# Altium PCB PCB1.PcbDoc (part 1 of 2)
Units mm, origin at the board's own origin, x right, y up, seen from the top; angles counter-clockwise.
Board outline 70 x 50 mm, 4 copper layers (Top Layer, Layer 1, Layer 2, Bottom Layer), stack 1.571 mm thick; 129 components, 87 nets, 486 pads, 124 vias.
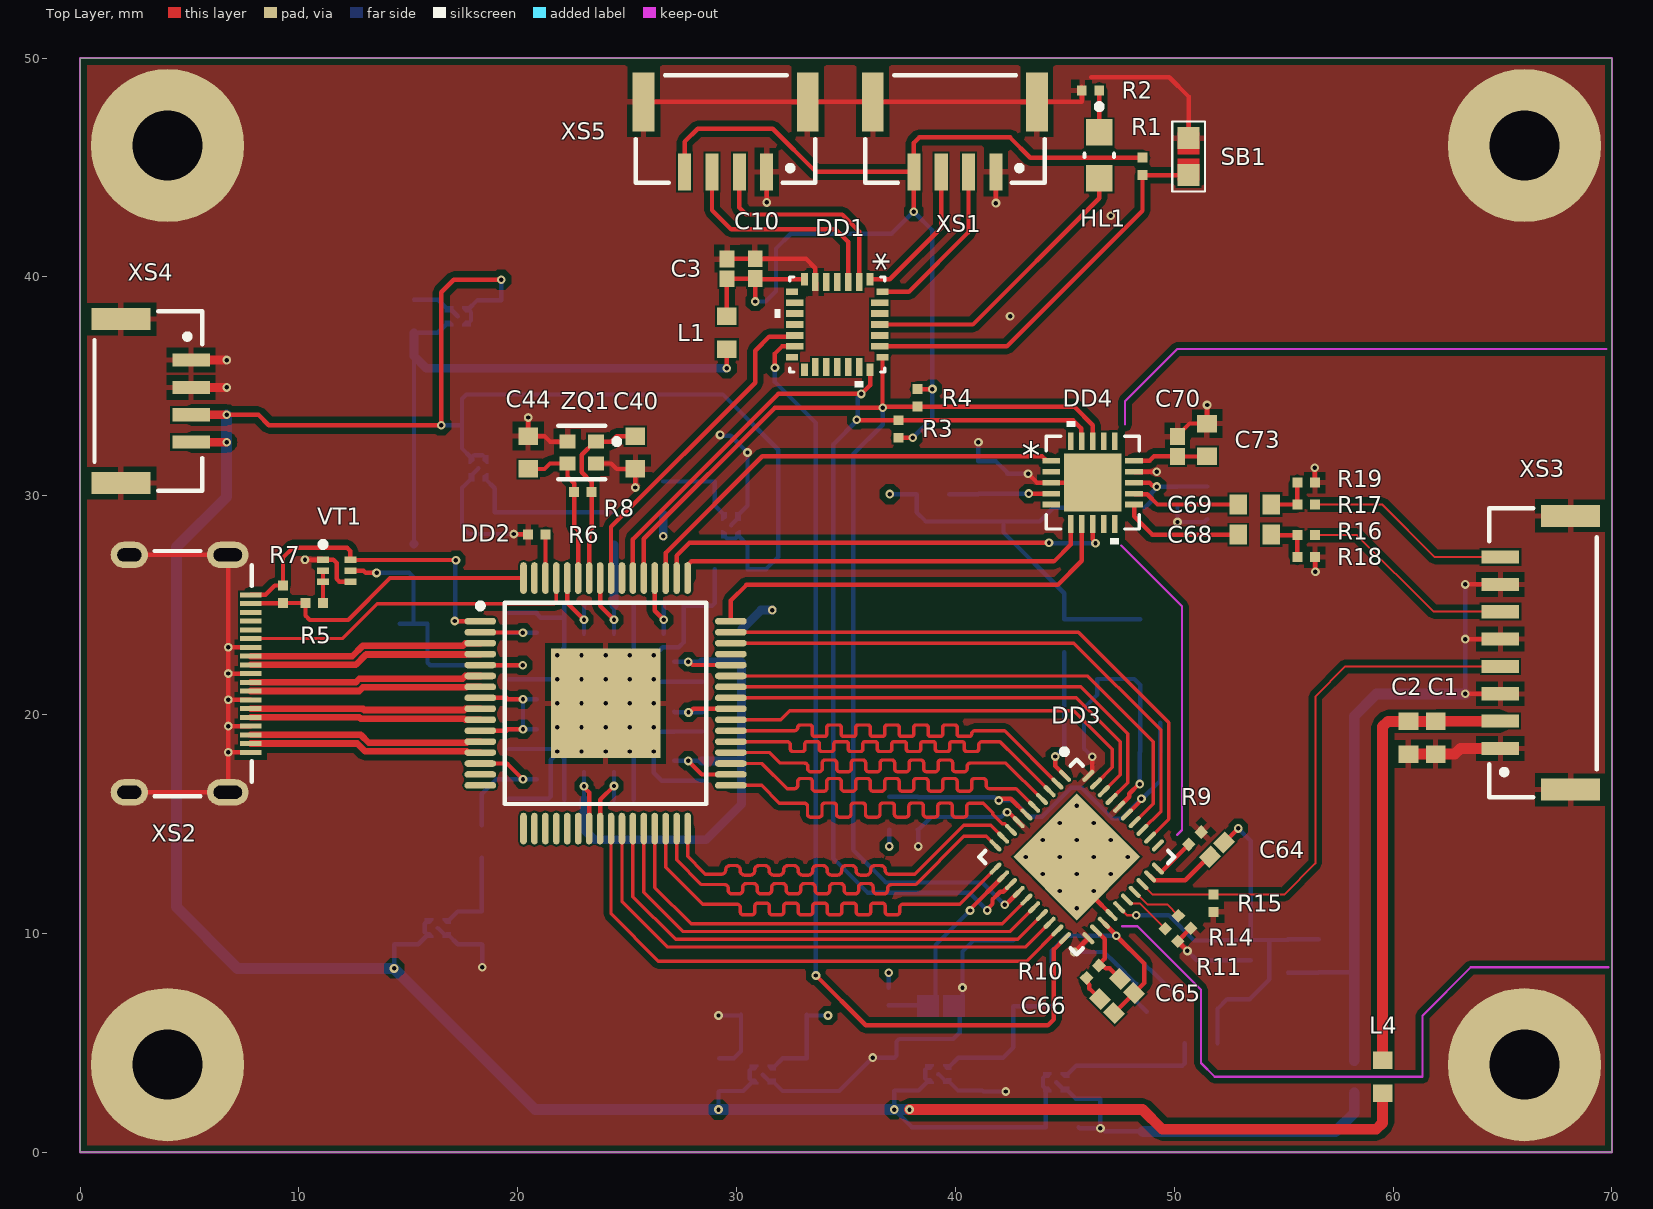
[diagram p0: Top Layer view]
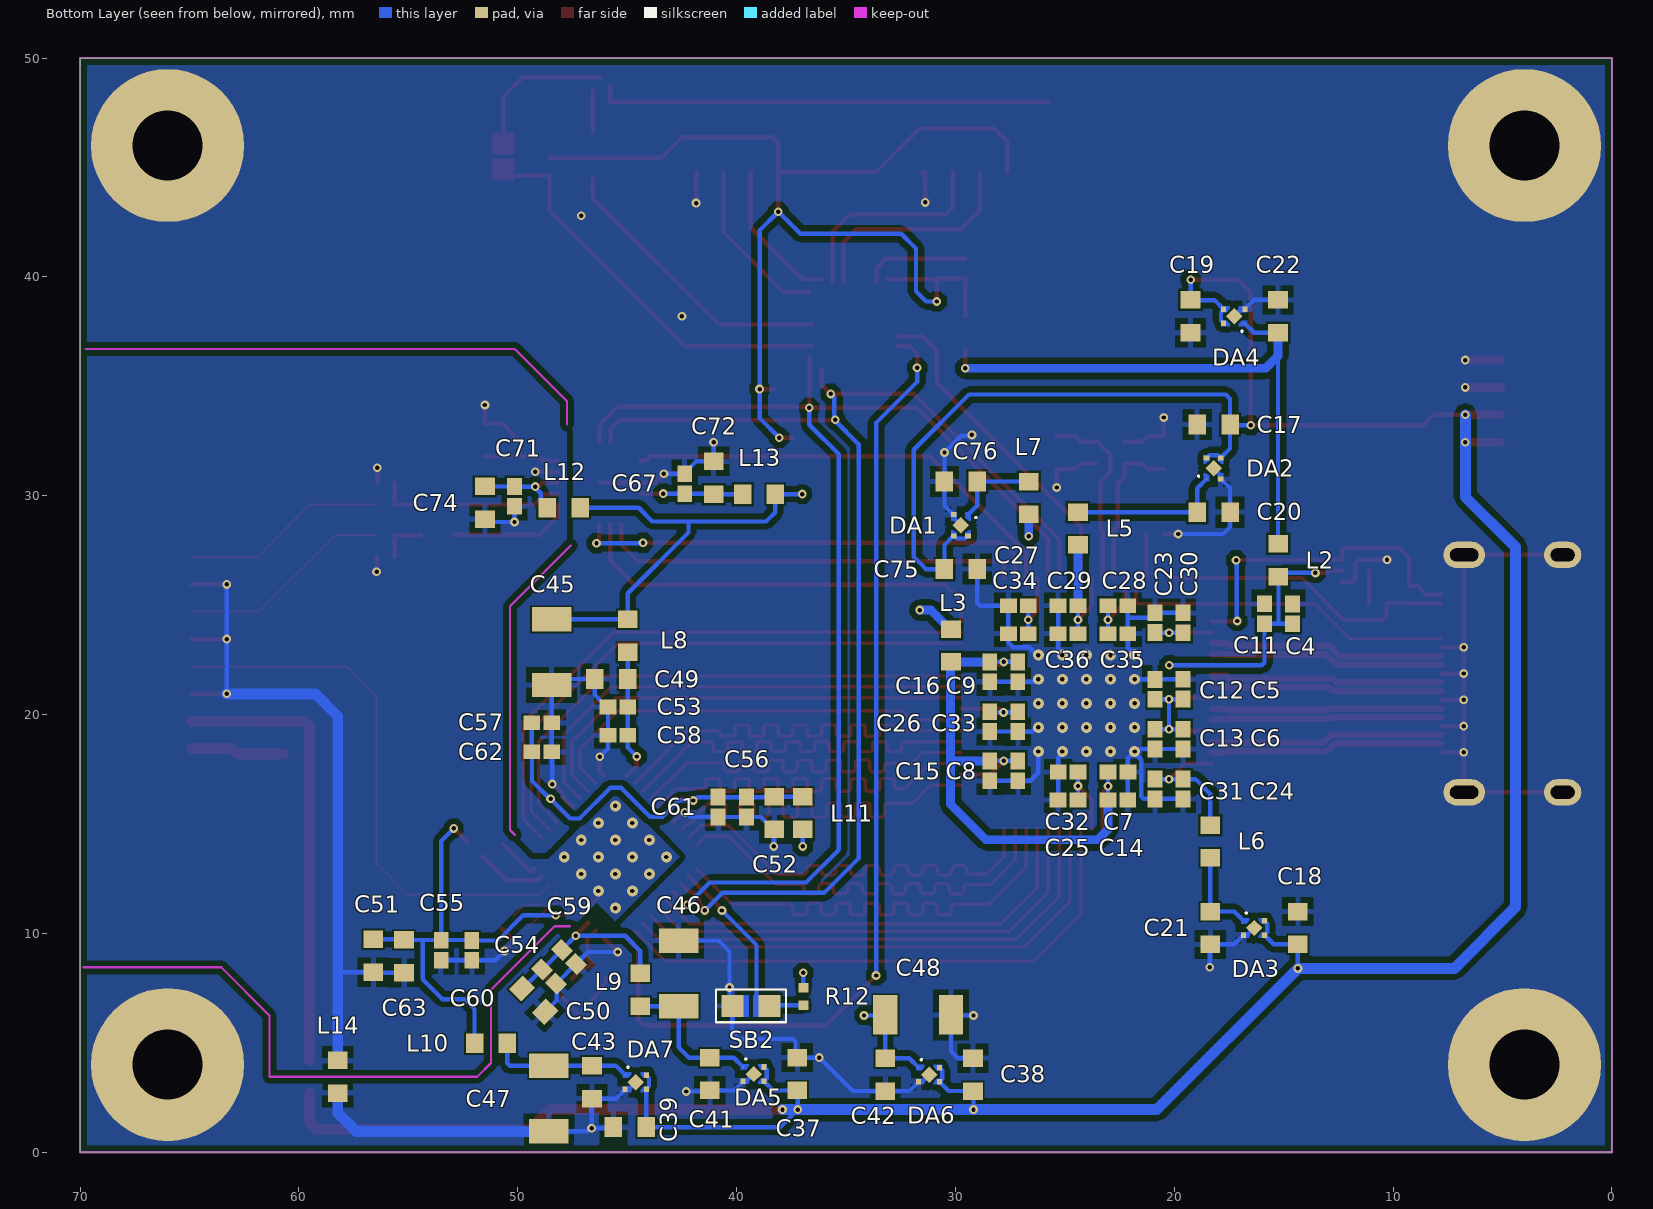
[diagram p1: Bottom Layer view, seen from below]
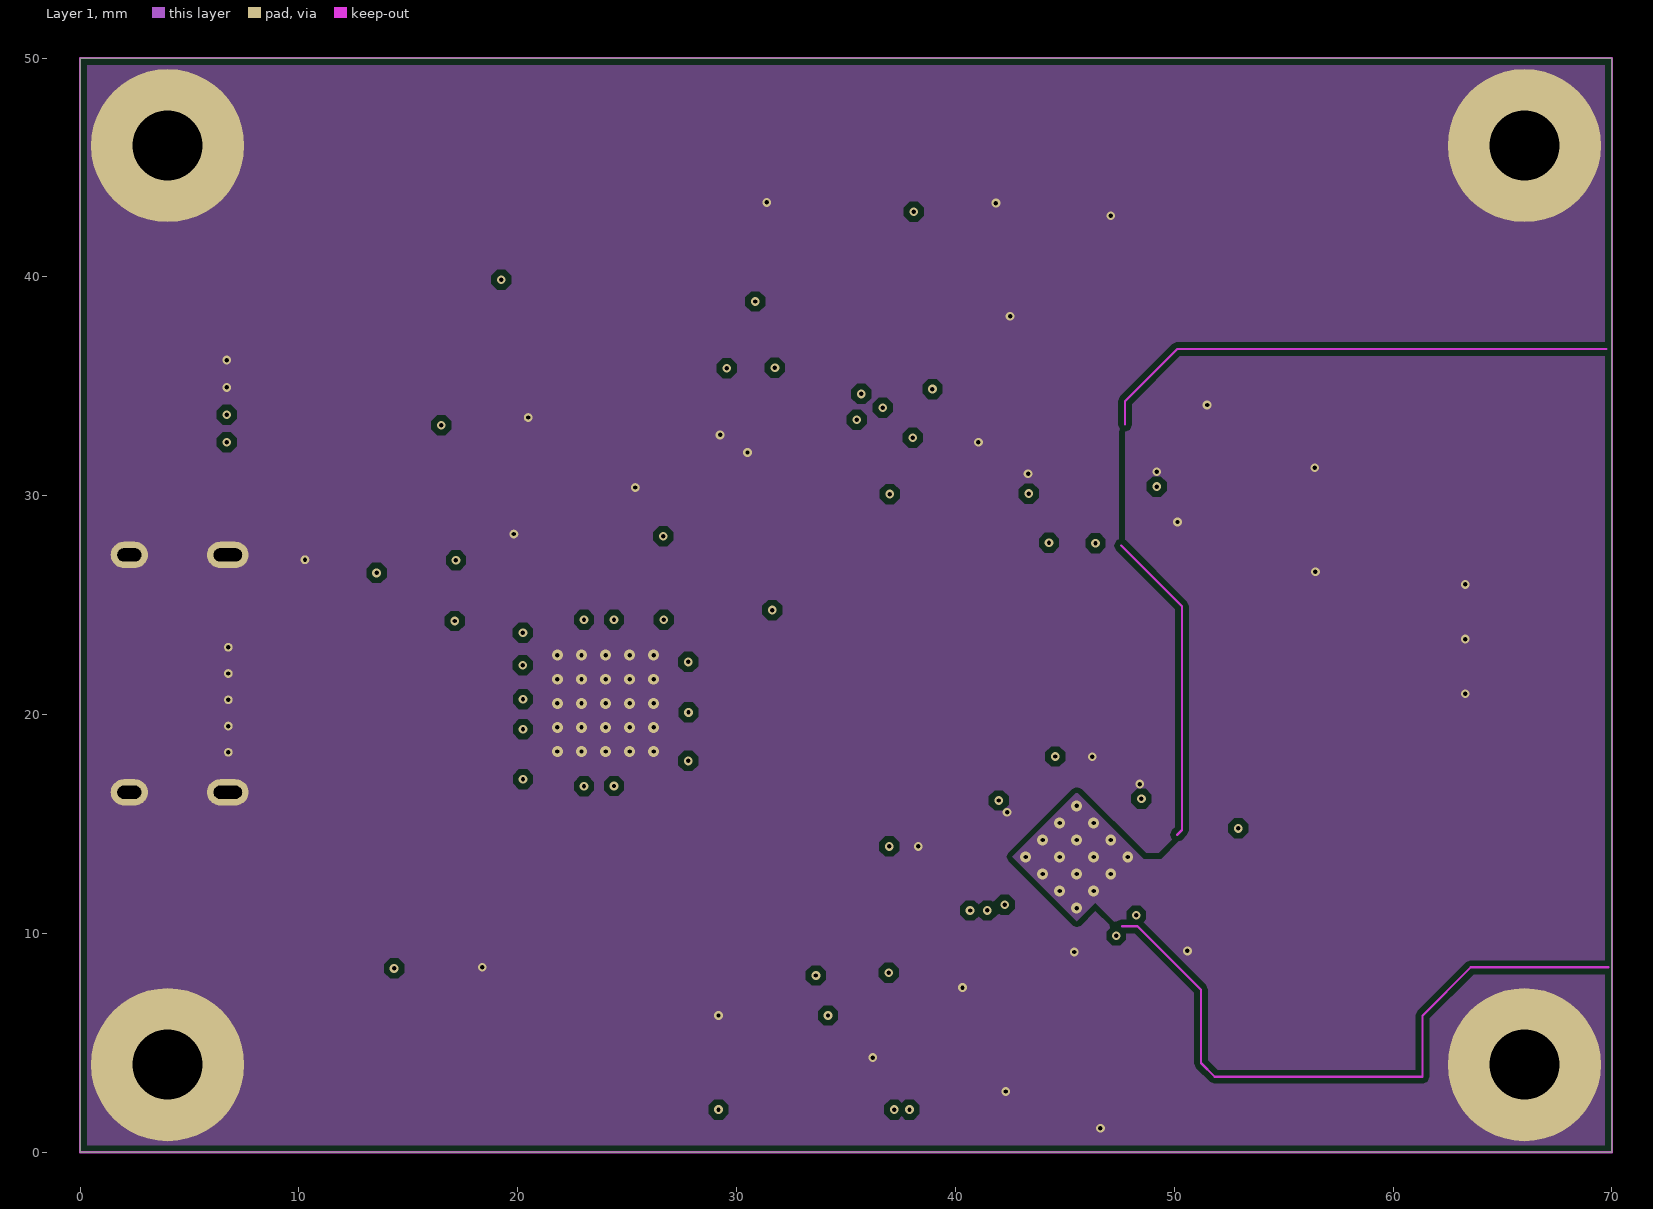
[diagram p2: Layer 1]
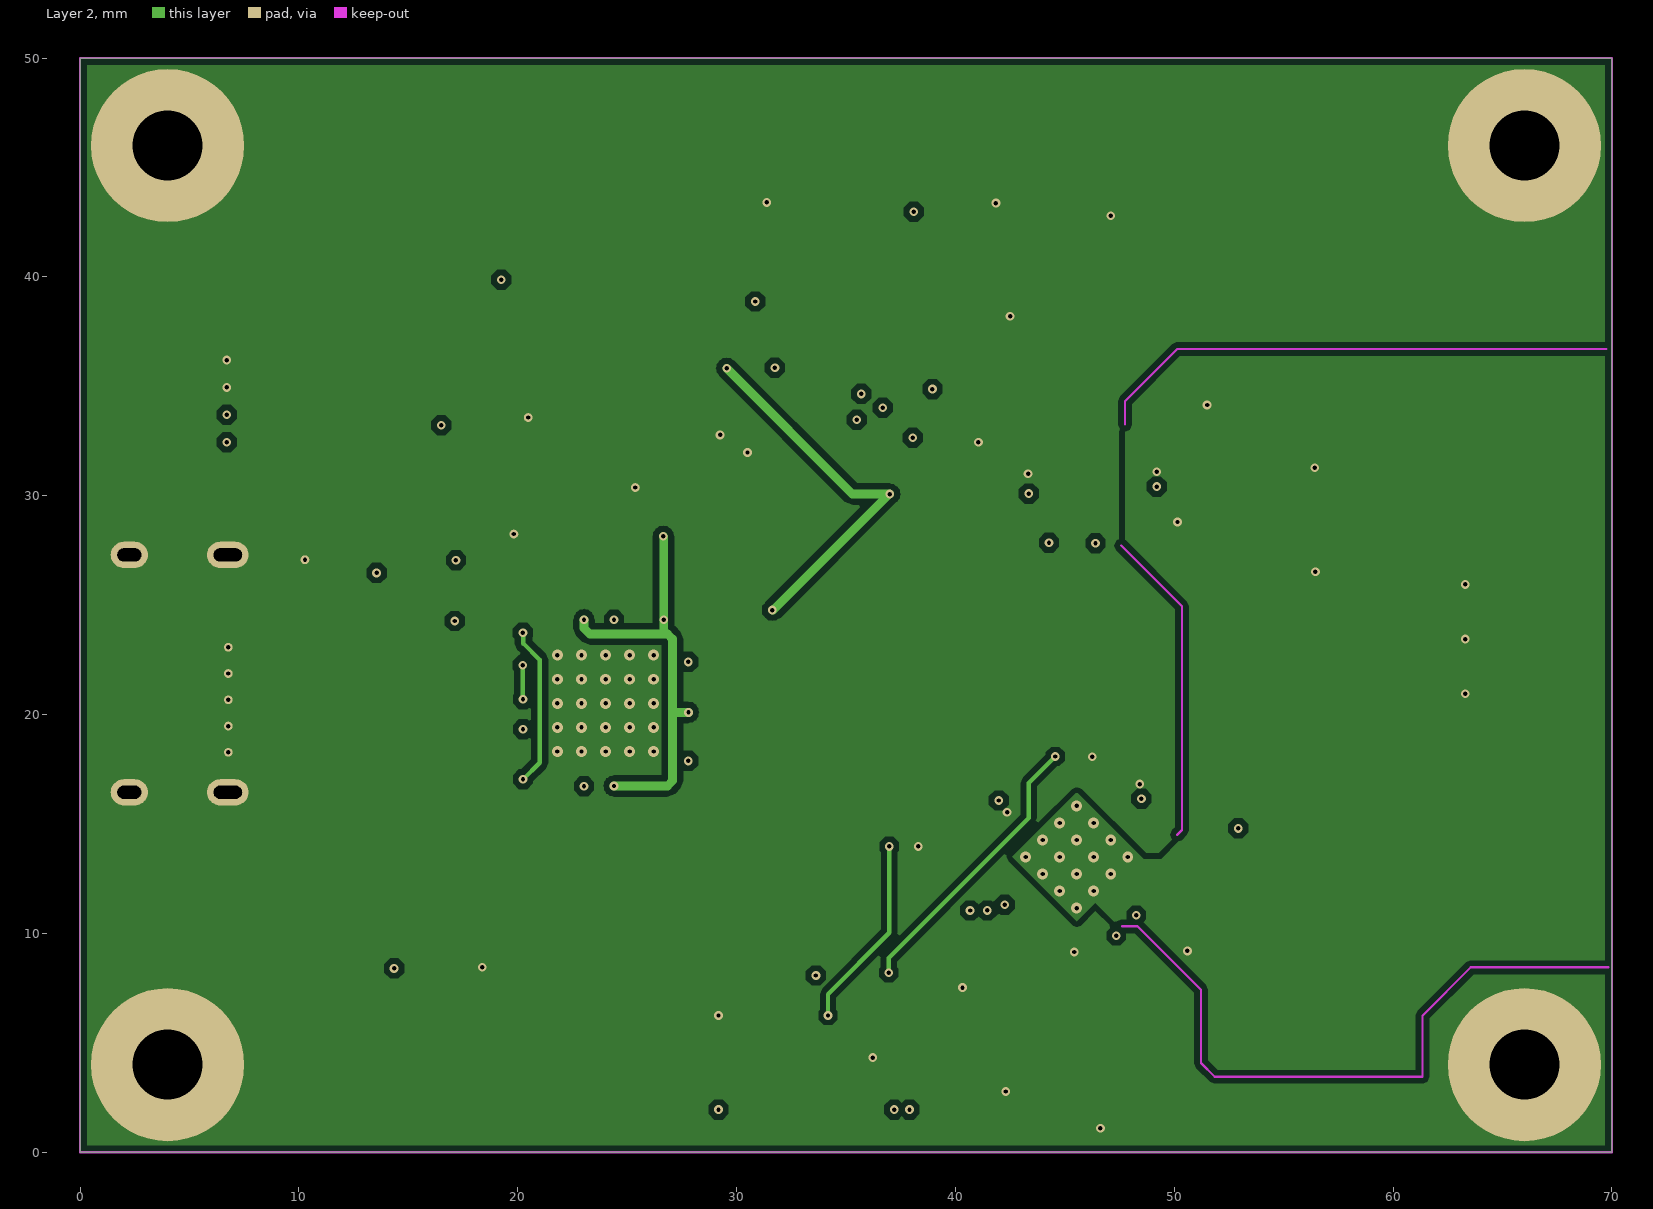
[diagram p3: Layer 2]
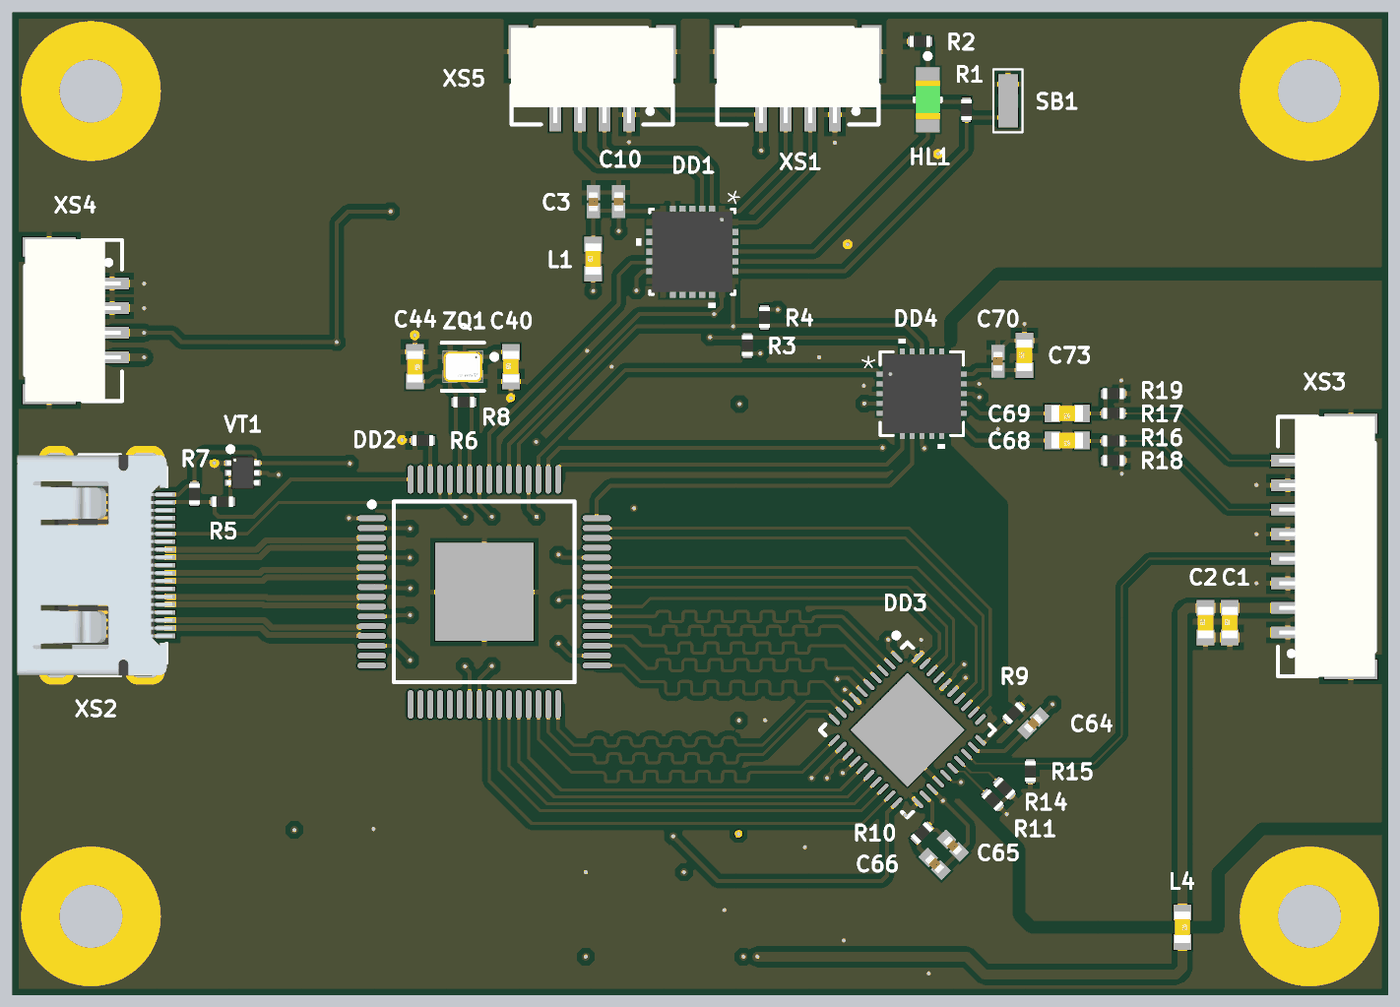
[diagram p5: 3D render of the assembled board from above, using the file's embedded part models]
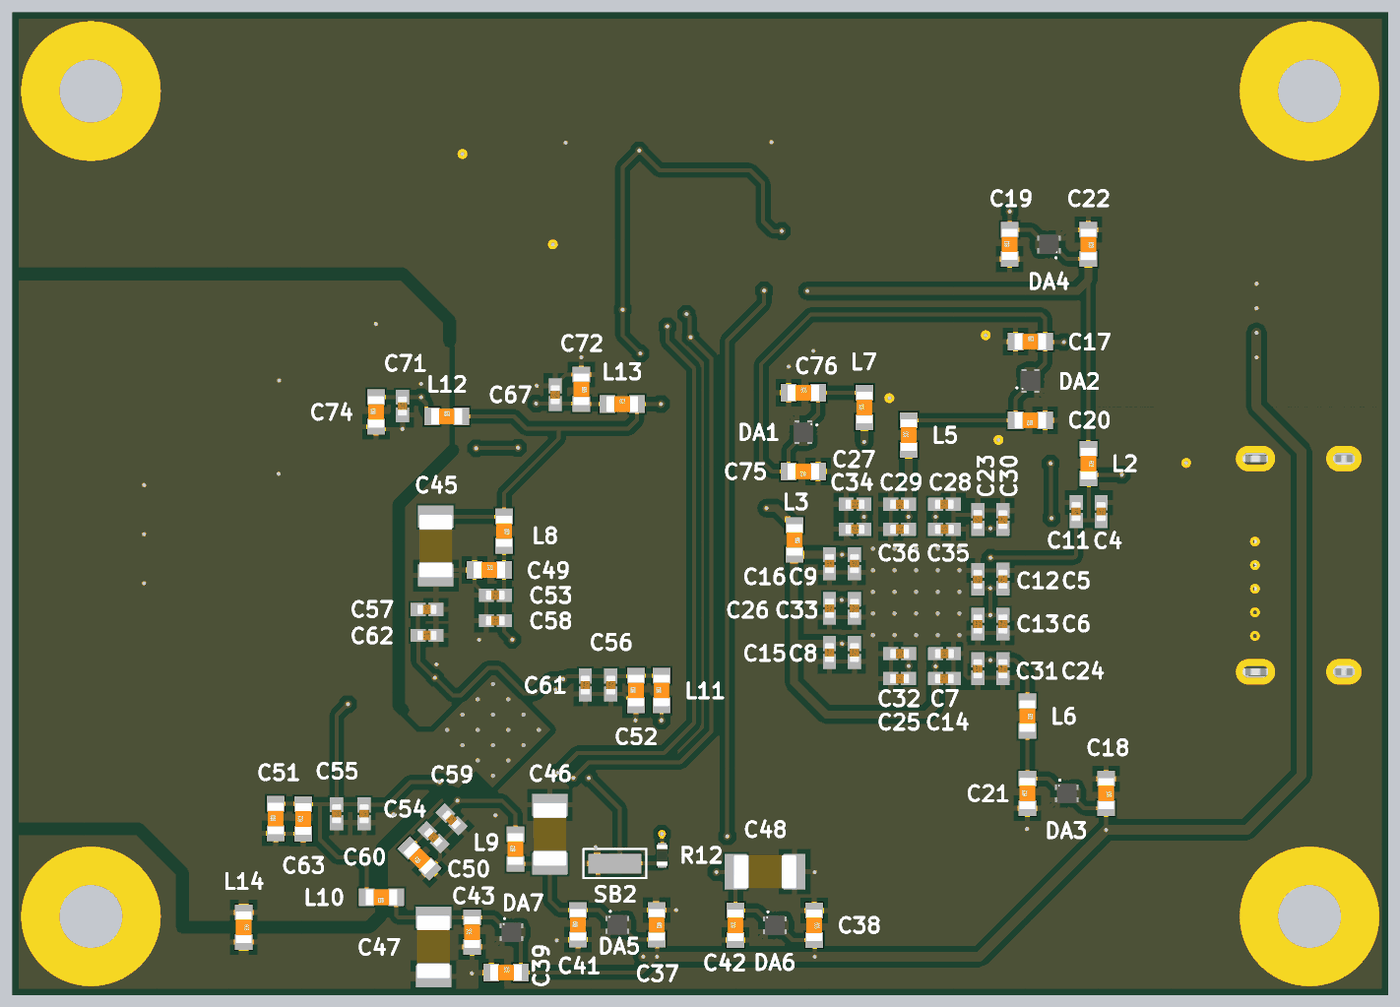
[diagram p6: 3D render of the assembled board from below, using the file's embedded part models]

## Layer stack, top to bottom
Top Solder: solder mask 0.0305, Solder Resist, Dk 3.8
Top Layer: signal copper 0.0356
Dielectric 2: prepreg 0.0994, IT-150DA, Dk 4.1
Layer 1: signal copper 0.018
Dielectric 1: core 1.265, FR4150, Dk 4.6
Layer 2: signal copper 0.018
Dielectric 3: prepreg 0.0994, IT-150DA, Dk 4.1
Bottom Layer: signal copper 0.0356
Bottom Solder: solder mask 0.0305, Solder Resist, Dk 3.8

## Board outline
0,0 70,0 70,50 0,50

## Design rules (kind name [scope] priority, off if disabled: settings)
AcuteAngle [All] p1: minimum=4.50000000000000E+0001 checktracksonly=TRUE
Clearance [All] p1: gap=0.254 ignorepadtopadclearanceinfootprint=FALSE except(0: Arc-Text Track-Text Text-Text; 0.089: Arc-Arc Arc-Track Track-Track; 0.1: SMDPad-Poly SMDPad-Region; 0.127: Arc-SMDPad Arc-THPad Track-SMDPad Track-THPad SMDPad-SMDPad SMDPad-THPad SMDPad-Via SMDPad-Fill THPad-Via; 0.381: SMDPad-Text THPad-Text Via-Text Fill-Text Poly-Text Region-Text; 0.508: THPad-THPad)
DiffPairsRouting [All] p1: maxlimit=0.127 minlimit=0.09 mostfreqgap=0.127 toplayer_maxgap=0.09 toplayer_prefgap=0.09 toplayer_minwidth=0.3 toplayer_maxwidth=0.3 toplayer_prefwidth=0.3 midlayer1_mingap=0.127 midlayer1_minwidth=0.358 midlayer1_maxwidth=0.358 midlayer1_prefwidth=0.358 midlayer2_mingap=0.127 midlayer2_minwidth=0.358 midlayer2_maxwidth=0.358 midlayer2_prefwidth=0.358 bottomlayer_maxgap=0.09 bottomlayer_prefgap=0.09 bottomlayer_minwidth=0.3 bottomlayer_maxwidth=0.3 bottomlayer_prefwidth=0.3 impedanceprofiledriven=TRUE impedanceprofileid={1F0A5EF4-3278-4179-9C0F-E6273FA66A4E} impedanceprofilevalue=50.000000 maxuncoupledlength=12.7
HoleSize [All] p1: absolutevalues=TRUE maxlimit=6.5 minlimit=0.2 maxpercent=80.000 minpercent=20.000
Length "Paralel RGB" [InNetClass('Paralel RGB')] p1: maxlimit=50 minlimit=0
MatchedLengths "Paralel RGBs" [InNetClass('Paralel RGB')] p1: tolerance=25.4 checknetsindiffpair=FALSE checkdiffpairvsdiffpair=TRUE checkxsignals=TRUE checkothers=TRUE usedelayunits=TRUE delaytolerance=50.000000
MatchedLengths "intra-pair HDMI" [InDifferentialPairClass('HDMI')] p2: tolerance=25.4 checknetsindiffpair=TRUE checkdiffpairvsdiffpair=FALSE checkxsignals=FALSE checkothers=FALSE usedelayunits=TRUE delaytolerance=5.000000
MatchedLengths "HDMI clock data" [InDifferentialPairClass('HDMI')] p3: tolerance=25.4 checknetsindiffpair=FALSE checkdiffpairvsdiffpair=TRUE checkxsignals=TRUE checkothers=TRUE usedelayunits=TRUE delaytolerance=150.000000
MinimumAnnularRing [All] p1: minimumring=0.1
MinimumSolderMaskSliver [All] p1: minsoldermaskwidth=0.1
ParallelSegment [InNetClass('Paralel RGB') vs InNetClass('Paralel RGB')] p1: limit=254 gap=0.5
PolygonConnect PolygonConnect_8 [All vs IsNamedPolygon('NONET_L-01_P-001') Or IsNamedPolygon('NONET_L-01_P-001') Or IsNamedPolygon('AGND_L02_P002') Or IsNamedPolygon('NONET_L-01_P-001') Or IsNamedPolygon('NONET_L-01_P-001') Or IsNamedPolygon('NONET_L-01_P-001') Or IsNamedPolygon('NONET_L-01_P-001') Or IsNamedPolygon('NONET_L-01_P-001')] p1: thpad.connectstyle=Direct thpad.reliefconductorwidth=0.254 thpad.reliefentries=4 thpad.polygonreliefangle="90 Angle" thpad.airgapwidth=0.254 smdpad.connectstyle=Relief smdpad.reliefconductorwidth=0.254 smdpad.reliefentries=4 smdpad.polygonreliefangle="90 Angle" smdpad.airgapwidth=0.254 via.connectstyle=Direct via.reliefconductorwidth=0.254 via.reliefentries=4 via.polygonreliefangle="90 Angle" via.airgapwidth=0.254
PolygonConnect PolygonConnect_7 [All vs IsNamedPolygon('NONET_L-01_P-001')] p2: thpad.connectstyle=Direct thpad.reliefconductorwidth=0.254 thpad.reliefentries=4 thpad.polygonreliefangle="90 Angle" thpad.airgapwidth=0.254 smdpad.connectstyle=Relief smdpad.reliefconductorwidth=0.254 smdpad.reliefentries=4 smdpad.polygonreliefangle="90 Angle" smdpad.airgapwidth=0.254 via.connectstyle=Direct via.reliefconductorwidth=0.254 via.reliefentries=4 via.polygonreliefangle="90 Angle" via.airgapwidth=0.254
PolygonConnect PolygonConnect_6 [All vs IsNamedPolygon('NETDD1_1_L01_P035')] p3: connectstyle=Direct reliefconductorwidth=0.254 reliefentries=4 polygonreliefangle="90 Angle" airgapwidth=0.254
PolygonConnect PolygonConnect_5 [All vs IsNamedPolygon('NETDD1_3_L01_P034')] p4: connectstyle=Direct reliefconductorwidth=0.254 reliefentries=4 polygonreliefangle="90 Angle" airgapwidth=0.254
PolygonConnect PolygonConnect_4 [All vs IsNamedPolygon('NETDD1_3_L01_P034')] p5: connectstyle=Direct reliefconductorwidth=0.254 reliefentries=4 polygonreliefangle="90 Angle" airgapwidth=0.254
PolygonConnect PolygonConnect_3 [All vs IsNamedPolygon('NETDD1_3_L01_P034')] p6: connectstyle=Direct reliefconductorwidth=0.254 reliefentries=4 polygonreliefangle="90 Angle" airgapwidth=0.254
PolygonConnect PolygonConnect_2 [All vs IsNamedPolygon('NETDD1_3_L01_P027')] p7: connectstyle=Direct reliefconductorwidth=0.254 reliefentries=4 polygonreliefangle="90 Angle" airgapwidth=0.254
PolygonConnect PolygonConnect_1 [All vs IsNamedPolygon('NETDD1_3_L01_P027')] p8: connectstyle=Direct reliefconductorwidth=0.254 reliefentries=2 polygonreliefangle="90 Angle" airgapwidth=0.254
PolygonConnect [All] p9: connectstyle=Relief reliefconductorwidth=0.254 reliefentries=4 polygonreliefangle="90 Angle" airgapwidth=0.254
RoutingVias [All] p1: holewidth=0.2 width=0.4 viastyle="Through Hole" minholewidth=0.15 minwidth=0.25 maxholewidth=6.3 maxwidth=6.3
SilkToSolderMaskClearance [IsPad] p1: minsilkscreentomaskgap=0.152 clearancetoexposedcopper=TRUE
SolderMaskExpansion [All] p1: expansion=0.05 istentingtop=FALSE
UnpouredPolygon [All] p1: allowunpoured=TRUE
Width Width_Analog [InNetClass('Analog video 75Om')] p1: maxlimit=0.09 minlimit=0.029 preferedwidth=0.09 toplayer_minwidth=0.09 midlayer1_maxwidth=0.029 midlayer1_prefwidth=0.029 midlayer2_maxwidth=0.029 midlayer2_prefwidth=0.029 bottomlayer_minwidth=0.09 impedanceprofiledriven=TRUE impedanceprofileid={9E80AB3A-CDE4-4DC0-9519-1BBCFE67738E} impedanceprofilevalue=75.000000 minimp=50.000000 maximp=50.000000 favimp=50.000000
Width Width_RGB [InNetClass('Paralel RGB')] p2: maxlimit=0.154 minlimit=0.131 preferedwidth=0.154 toplayer_minwidth=0.154 midlayer1_maxwidth=0.131 midlayer1_prefwidth=0.131 midlayer2_maxwidth=0.131 midlayer2_prefwidth=0.131 bottomlayer_minwidth=0.154 impedanceprofiledriven=TRUE impedanceprofileid={F8809D54-EE6C-49FF-9726-586E26A39905} impedanceprofilevalue=50.000000 minimp=50.000000 maximp=50.000000 favimp=50.000000
Width [All] p3: maxlimit=25.4 minlimit=0.102 preferedwidth=0.2
25 further rules are at their usual default settings.

## Classes and differential pairs
differential pair class HDMI: "TMDS Clock" "TMDS Data0" "TMDS Data1" "TMDS Data2"
net class "Paralel RGB": HS LLC P0 P1 P2 P3 P4 P5 P6 P7 P8 P9 P10 P11 P12 P13 P14 P15 VS
net class "Analog video 75Om": CV_out Lout NetDD3_26 NetDD3_27 Rout
differential pair "TMDS Data2": +"TMDS Data2_P" -"TMDS Data2_N"
differential pair "TMDS Data1": +"TMDS Data1_P" -"TMDS Data1_N"
differential pair "TMDS Data0": +"TMDS Data0_P" -"TMDS Data0_N"
differential pair "TMDS Clock": +"TMDS Clock_P" -"TMDS Clock_N"

## Components (designator, comment, footprint, x,y, rotation, side; value= is the part's Value field where it differs from the comment)
C1 "CL10A106MQ8NNNC" SC0603_L 61.949,18.943 r90 top value=10uF
C2 "CL10A106MQ8NNNC" SC0603_L 60.707,18.943 r90 top value=10uF
C3 "C0402C104K4RAC7867" FP-C0402-BB-IPC_A 29.559,40.371 r270 top value=100nF
C4 "C0402C104K4RAC7867" FP-C0402-BB-IPC_A 14.6,24.604 r270 bottom value=100nF
C5 "C0402C104K4RAC7867" FP-C0402-BB-IPC_A 19.6,21.161 r270 bottom value=100nF
C6 "C0402C104K4RAC7867" FP-C0402-BB-IPC_A 19.6,18.879 r90 bottom value=100nF
C7 "C0402C104K4RAC7867" FP-C0402-BB-IPC_A 22.571,17.375 r0 bottom value=100nF
C8 "C0402C104K4RAC7867" FP-C0402-BB-IPC_A 27.15,17.429 r90 bottom value=100nF
C9 "C0402C104K4RAC7867" FP-C0402-BB-IPC_A 27.15,21.954 r90 bottom value=100nF
C10 "C0402C103K4RAC7867" FP-C0402-BB-IPC_A 30.85,40.379 r270 top value=10nF
C11 "C0402C103K4RAC7867" FP-C0402-BB-IPC_A 15.875,24.607 r270 bottom value=10nF
C12 "C0402C103K4RAC7867" FP-C0402-BB-IPC_A 20.875,21.154 r270 bottom value=10nF
C13 "C0402C103K4RAC7867" FP-C0402-BB-IPC_A 20.875,18.879 r90 bottom value=10nF
C14 "C0402C103K4RAC7867" FP-C0402-BB-IPC_A 22.579,16.1 r0 bottom value=10nF
C15 "C0402C103K4RAC7867" FP-C0402-BB-IPC_A 28.425,17.429 r90 bottom value=10nF
C16 "C0402C103K4RAC7867" FP-C0402-BB-IPC_A 28.425,21.954 r90 bottom value=10nF
C17 "CC0603KRX5R8BB105" SC0603_L 18.201,33.253 r180 bottom value=1uF
C18 "CC0603KRX5R8BB105" SC0603_L 14.35,10.25 r270 bottom value=1uF
C19 "CC0603KRX5R8BB105" SC0603_L 19.258,38.199 r90 bottom value=1uF
C20 "CC0603KRX5R8BB105" SC0603_L 18.201,29.253 r0 bottom value=1uF
C21 "CC0603KRX5R8BB105" SC0603_L 18.35,10.25 r90 bottom value=1uF
C22 "CC0603KRX5R8BB105" SC0603_L 15.258,38.199 r270 bottom value=1uF
C23 "C0402C103K4RAC7867" FP-C0402-BB-IPC_A 20.875,24.2 r270 bottom value=10nF
C24 "C0402C103K4RAC7867" FP-C0402-BB-IPC_A 19.6,16.6 r90 bottom value=10nF
C25 "C0402C103K4RAC7867" FP-C0402-BB-IPC_A 24.854,16.1 r180 bottom value=10nF
C26 "C0402C103K4RAC7867" FP-C0402-BB-IPC_A 28.425,19.679 r90 bottom value=10nF
C27 "C0402C103K4RAC7867" FP-C0402-BB-IPC_A 27.125,24.975 r180 bottom value=10nF
C28 "C0402C103K4RAC7867" FP-C0402-BB-IPC_A 22.579,24.975 r0 bottom value=10nF
C29 "C0402C103K4RAC7867" FP-C0402-BB-IPC_A 24.854,24.975 r180 bottom value=10nF
C30 "C0402C104K4RAC7867" FP-C0402-BB-IPC_A 19.6,24.196 r270 bottom value=100nF
C31 "C0402C104K4RAC7867" FP-C0402-BB-IPC_A 20.875,16.6 r90 bottom value=100nF
C32 "C0402C104K4RAC7867" FP-C0402-BB-IPC_A 24.85,17.375 r180 bottom value=100nF
C33 "C0402C104K4RAC7867" FP-C0402-BB-IPC_A 27.15,19.675 r90 bottom value=100nF
C34 "C0402C104K4RAC7867" FP-C0402-BB-IPC_A 27.125,23.7 r180 bottom value=100nF
C35 "C0402C104K4RAC7867" FP-C0402-BB-IPC_A 22.575,23.7 r0 bottom value=100nF
C36 "C0402C104K4RAC7867" FP-C0402-BB-IPC_A 24.854,23.7 r180 bottom value=100nF
C37 "CC0603KRX5R8BB105" SC0603_L 37.222,3.572 r270 bottom value=1uF
C38 "CC0603KRX5R8BB105" SC0603_L 29.2,3.547 r270 bottom value=1uF
C39 "CC0603KRX5R8BB105" SC0603_L 44.875,1.15 r180 bottom value=1uF
C40 "C0603-10pF-16V-C0603C100F4HAC7867" SC0603_L 25.375,31.975 r90 top value=10pF
C41 "CC0603KRX5R8BB105" SC0603_L 41.222,3.572 r90 bottom value=1uF
C42 "CC0603KRX5R8BB105" SC0603_L 33.2,3.547 r90 bottom value=1uF
C43 "CC0603KRX5R8BB105" SC0603_L 46.606,3.201 r90 bottom value=1uF
C44 "C0603-10pF-16V-C0603C100F4HAC7867" SC0603_L 20.475,31.975 r270 top value=10pF
C45 "C3216X5R1E336M160AC" 1206 48.45,22.85 r90 bottom value=33uF
C46 "C3216X5R1E336M160AC" 1206 42.65,8.175 r270 bottom value=33uF
C47 "C3216X5R1E336M160AC" 1206 48.575,2.45 r90 bottom value=33uF
C48 "C3216X5R1E336M160AC" 1206 31.7,6.275 r0 bottom value=33uF
C49 "CL10A106MQ8NNNC" SC0603_L 45.725,21.625 r180 bottom value=10uF
C50 "CL10A106MQ8NNNC" SC0603_L 49.275,6.95 r45 bottom value=10uF
C51 "CL10A106MQ8NNNC" SC0603_L 56.6,8.975 r90 bottom value=10uF
C52 "CL10A106MQ8NNNC" SC0603_L 38.275,15.5 r90 bottom value=10uF
C53 "C0402C104K4RAC7867" FP-C0402-BB-IPC_A 45.425,20.35 r180 bottom value=100nF
C54 "C0402C104K4RAC7867" FP-C0402-BB-IPC_A 48.579,8.029 r45 bottom value=100nF
C55 "C0402C104K4RAC7867" FP-C0402-BB-IPC_A 53.5,9.229 r90 bottom value=100nF
C56 "C0402C104K4RAC7867" FP-C0402-BB-IPC_A 39.55,15.775 r90 bottom value=100nF
C57 "C0402C103K4RAC7867" FP-C0402-BB-IPC_A 48.904,19.625 r0 bottom value=10nF
C58 "C0402C103K4RAC7867" FP-C0402-BB-IPC_A 45.425,19.05 r180 bottom value=10nF
C59 "C0402C103K4RAC7867" FP-C0402-BB-IPC_A 47.654,8.929 r45 bottom value=10nF
C60 "C0402C103K4RAC7867" FP-C0402-BB-IPC_A 52.1,9.225 r90 bottom value=10nF
C61 "C0402C103K4RAC7867" FP-C0402-BB-IPC_A 40.85,15.775 r90 bottom value=10nF
C62 "C0402C104K4RAC7867" FP-C0402-BB-IPC_A 48.904,18.3 r0 bottom value=100nF
C63 "CC0603KRX5R8BB105" SC0603_L 55.2,8.95 r90 bottom value=1uF
C64 "C0402C222K3RAC7867" FP-C0402-BB-IPC_A 51.95,13.825 r225 top value=2.2nF
C65 "C0402C222K3RAC7867" FP-C0402-BB-IPC_A 47.85,7.6 r315 top value=1.2nF
C66 "CGA2B1X7R1V154K050BC" FP-C0402-BB-IPC_A 46.925,6.675 r315 top value=150nF
C67 "C0402C104K4RAC7867" FP-C0402-BB-IPC_A 42.375,30.55 r270 bottom value=100nF
C68 "CL10A106MQ8NNNC" SC0603_L 53.675,28.225 r180 top value=10uF
C69 "CL10A106MQ8NNNC" SC0603_L 53.675,29.6 r180 top value=10uF
C70 "C0402C104K4RAC7867" FP-C0402-BB-IPC_A 50.15,32.25 r90 top value=100nF
C71 "C0402C104K4RAC7867" FP-C0402-BB-IPC_A 50.15,29.971 r90 bottom value=100nF
C72 "CL10A106MQ8NNNC" SC0603_L 41.05,30.825 r270 bottom value=10uF
C73 "CL10A106MQ8NNNC" SC0603_L 51.5,32.55 r90 top value=10uF
C74 "CL10A106MQ8NNNC" SC0603_L 51.5,29.675 r90 bottom value=10uF
C75 "CC0603KRX5R8BB105" SC0603_L 29.75,26.65 r0 bottom value=1uF
C76 "CC0603KRX5R8BB105" SC0603_L 29.75,30.65 r180 bottom value=1uF
DA1 "NCP161AMX180TBG" XDFN4_711AJ_ONS_OSI 29.75,28.65 r270 bottom
DA2 "NCP161AMX180TBG" XDFN4_711AJ_ONS_OSI 18.201,31.253 r90 bottom
DA3 "NCP161AMX180TBG" XDFN4_711AJ_ONS_OSI 16.35,10.25 r180 bottom
DA4 "NCP161AMX330TBG" XDFN4_711AJ_ONS_OSI 17.258,38.199 r0 bottom
DA5 "NCP161AMX180TBG" XDFN4_711AJ_ONS_OSI 39.222,3.572 r180 bottom
DA6 "NCP161AMX180TBG" XDFN4_711AJ_ONS_OSI 31.2,3.547 r180 bottom
DA7 "NCP161AMX330TBG" XDFN4_711AJ_ONS_OSI 44.606,3.201 r180 bottom
DD1 "STM8L151G6U6TR" UFQFPN28-4x4mm 34.6,37.825 r270 top locked
DD2 "ADV7611BSWZ-RL" ADI-SW-64-2_N 24.013,20.514 r0 top locked
DD3 "ADV7393WBCPZ-REEL" ADI-CP-40-1_N 45.542,13.492 r315 top locked
DD4 "SSM2604CPZ-REEL7" CP_20_4_ADI 46.275,30.6 r0 top
HL1 "LTST-C170GKT" LED_0805_G 46.573,45.556 r270 top
L1 "ferrite bead" SC0603_L 29.55,37.45 r90 top value="600 Ohms 100 MHz"
L2 "ferrite bead" SC0603_L 15.25,27.05 r270 bottom value="600 Ohms 100 MHz"
L3 "ferrite bead" SC0603_L 30.197,23.157 r270 bottom value="600 Ohms 100 MHz"
L4 "ferrite bead" SC0603_L 59.525,3.45 r270 top value="600 Ohms 100 MHz"
L5 "ferrite bead" SC0603_L 24.4,28.5 r90 bottom value="600 Ohms 100 MHz"
L6 "ferrite bead" SC0603_L 18.35,14.2 r270 bottom value="600 Ohms 100 MHz"
L7 "ferrite bead" SC0603_L 26.65,29.9 r90 bottom value="600 Ohms 100 MHz"
L8 "ferrite bead" SC0603_L 44.975,23.6 r270 bottom value="600 Ohms 100 MHz"
L9 "ferrite bead" SC0603_L 44.4,7.425 r90 bottom value="600 Ohms 100 MHz"
L10 "ferrite bead" SC0603_L 51.225,4.975 r0 bottom value="600 Ohms 100 MHz"
L11 "ferrite bead" SC0603_L 36.975,15.5 r90 bottom value="600 Ohms 100 MHz"
L12 "ferrite bead" SC0603_L 47.9,29.45 r180 bottom value="600 Ohms 100 MHz"
L13 "ferrite bead" SC0603_L 38.975,30.075 r180 bottom value="600 Ohms 100 MHz"
L14 "ferrite bead" SC0603_L 58.225,3.45 r270 bottom value="600 Ohms 100 MHz"
R1 "ERJ-2RKF1002X" RC04025-L 48.55,45.05 r270 top value=10k
R2 "ERJ-2RKF5100X" RC04025-L 46.175,48.525 r180 top value=510
R3 "ERJ-2RKF4701X" RC04025-L 37.4,33.05 r270 top value=4.7k
R4 "ERJ-2RKF4701X" RC04025-L 38.275,34.475 r90 top value=4.7k
R5 "ERJ-2RKF1003X" RC04025-L 10.7,25.1 r180 top value=100k
R6 "ERJ-2RKF1002X" RC04025-L 20.875,28.225 r0 top value=10k
R7 "ERJ-2RKF1001X" RC04025-L 9.275,25.5 r90 top value=1k
R8 "RK73H1ETTP3903F" RC04025-L 22.975,30.175 r180 top value=390k
R9 "ERJ-2RKF5100X" RC04025-L 50.95,14.35 r45 top value=510
R10 "ERJ-2RKF1690X" RC04025-L 46.275,8.25 r225 top value=169
R11 "ERJ-2GEJ750X" RC04025-L 49.875,9.925 r135 top value=75
R12 "ERJ-2RKF1002X" RC04025-L 36.944,7.115 r270 bottom value=10k
R14 "ERJ-2GEJ750X" RC04025-L 50.475,10.525 r135 top value=75
R15 "ERJ-2GEJ750X" RC04025-L 51.8,11.375 r90 top value=75
R16 "ERJ-2RKF1000X" RC04025-L 56.025,28.2 r0 top value=100
R17 "ERJ-2RKF1000X" RC04025-L 56.025,29.6 r0 top value=100
R18 "ERJ-2RKF4702X" RC04025-L 56.025,27.2 r180 top value=47k
R19 "ERJ-2RKF4702X" RC04025-L 56.025,30.6 r180 top value=47k
SB1 "Jumper SB" SB0603 50.655,45.504 r270 top
SB2 "Jumper SB" SB0603 39.344,6.69 r180 bottom
VT1 "FDY3000NZ" FAIR-SOT-563F-6-A_V 11.725,26.575 r0 top
XS1 "SM04B-GHS-TB" SM04B-GHS-TB 39.975,46.675 r0 top
XS2 "685119136923" 685119136923 4.05,21.874 r270 top
XS3 "SM08B-GHS-TB" SM08B-GHS-TB 66.775,22.825 r270 top
XS4 "SM04B-GHS-TB" SM04B-GHS-TB 3.2,34.325 r90 top
XS5 "SM04B-GHS-TB" SM04B-GHS-TB 29.5,46.675 r0 top
ZQ1 "ABM11-28.63636MHZ-D2X-T3" FP-ABM11-MFG 22.925,31.975 r180 top

## Footprints (in the part's own frame and the unit in brackets; to place one, negate y for a bottom-side part, rotate by r counter-clockwise, add the part's x,y. Pads: shape width x height; smd on the part's side, far side on the other; paste and mask are expansions set on the pad)
1206 [mil]
  rect 44x71 smd paste+0 mask+0: 1(-59,0) 2(59,0)
  body extent -63,-33 63,33, height 68
685119136923 [mm] "Mini HDMI SMT Horizontal"
  rect 0.23x1 smd: 1(3.6,3.75) 2(3.2,3.75) 3(2.8,3.75) 4(2.4,3.75) 5(2,3.75) 6(1.6,3.75) 7(1.2,3.75) 8(0.8,3.75) 9(0.4,3.75) 10(0,3.75) 11(-0.4,3.75) 12(-0.8,3.75) 13(-1.2,3.75) 14(-1.6,3.75) 15(-2,3.75) 16(-2.4,3.75) 17(-2.8,3.75) 18(-3.2,3.75) 19(-3.6,3.75)
  oval 1.2x1.9 hole 0.6 slot 1.3 at 90 deg: Shell(-5.425,2.7) Shell(5.425,2.7)
  oval 1.2x1.7 hole 0.6 slot 1.1 at 90 deg: Shell(-5.425,-1.8) Shell(5.425,-1.8)
  silkscreen extent -5.6,-0.65 5.6,3.8, body extent -5.62,-3.8 5.63,4.1, height 3.3
ADI-CP-40-1_N [mm] "QFN, 40-Leads, Body 6x6mm, Pitch 0.5mm, Thermal Pad 4.1x4.1mm, IPC Medium Density"
  oval 0.7x0.2 smd: 1(-3,2.25) 2(-3,1.75) 3(-3,1.25) 4(-3,0.75) 5(-3,0.25) 6(-3,-0.25) 7(-3,-0.75) 8(-3,-1.25) 9(-3,-1.75) 10(-3,-2.25) 21(3,-2.25) 22(3,-1.75) 23(3,-1.25) 24(3,-0.75) 25(3,-0.25) 26(3,0.25) 27(3,0.75) 28(3,1.25) 29(3,1.75) 30(3,2.25)
  oval 0.2x0.7 smd: 11(-2.25,-3) 12(-1.75,-3) 13(-1.25,-3) 14(-0.75,-3) 15(-0.25,-3) 16(0.25,-3) 17(0.75,-3) 18(1.25,-3) 19(1.75,-3) 20(2.25,-3) 31(2.25,3) 32(1.75,3) 33(1.25,3) 34(0.75,3) 35(0.25,3) 36(-0.25,3) 37(-0.75,3) 38(-1.25,3) 39(-1.75,3) 40(-2.25,3)
  rect 4.1x4.1 smd: 41(0,0)
  silkscreen extent -3.92,-3.15 3.15,3.15, body extent -3,-3 3,3, height 1
ADI-SW-64-2_N [mm] "LQFP, 64-Leads, Body 10.00x10.00mm, Pitch 0.50mm, Thermal Pad 5x5mm, IPC Medium Density"
  oval 1.45x0.3 smd: 1(-5.725,3.75) 2(-5.725,3.25) 3(-5.725,2.75) 4(-5.725,2.25) 5(-5.725,1.75) 6(-5.725,1.25) 7(-5.725,0.75) 8(-5.725,0.25) 9(-5.725,-0.25) 10(-5.725,-0.75) 11(-5.725,-1.25) 12(-5.725,-1.75) 13(-5.725,-2.25) 14(-5.725,-2.75) 15(-5.725,-3.25) 16(-5.725,-3.75) 33(5.725,-3.75) 34(5.725,-3.25) 35(5.725,-2.75) 36(5.725,-2.25) 37(5.725,-1.75) 38(5.725,-1.25) 39(5.725,-0.75) 40(5.725,-0.25) 41(5.725,0.25) 42(5.725,0.75) 43(5.725,1.25) 44(5.725,1.75) 45(5.725,2.25) 46(5.725,2.75) 47(5.725,3.25) 48(5.725,3.75)
  oval 0.3x1.45 smd: 17(-3.75,-5.725) 18(-3.25,-5.725) 19(-2.75,-5.725) 20(-2.25,-5.725) 21(-1.75,-5.725) 22(-1.25,-5.725) 23(-0.75,-5.725) 24(-0.25,-5.725) 25(0.25,-5.725) 26(0.75,-5.725) 27(1.25,-5.725) 28(1.75,-5.725) 29(2.25,-5.725) 30(2.75,-5.725) 31(3.25,-5.725) 32(3.75,-5.725) 49(3.75,5.725) 50(3.25,5.725) 51(2.75,5.725) 52(2.25,5.725) 53(1.75,5.725) 54(1.25,5.725) 55(0.75,5.725) 56(0.25,5.725) 57(-0.25,5.725) 58(-0.75,5.725) 59(-1.25,5.725) 60(-1.75,5.725) 61(-2.25,5.725) 62(-2.75,5.725) 63(-3.25,5.725) 64(-3.75,5.725)
  rect 5x5 smd: 65(0,0)
  silkscreen extent -5.85,-4.6 4.6,4.6, body extent -5,-5 5,5, height 1.6
CP_20_4_ADI [mil]
  rect 32x10 smd paste+0 mask+0: 1(-74.5,39.37) 2(-74.5,19.68) 3(-74.5,0) 4(-74.5,-19.69) 5(-74.5,-39.37) 11(74.5,-39.37) 12(74.5,-19.69) 13(74.5,0) 14(74.5,19.68) 15(74.5,39.37)
  rect 10x32 smd paste+0 mask+0: 6(-39.37,-74.5) 7(-19.68,-74.5) 8(0,-74.5) 9(19.68,-74.5) 10(39.37,-74.5) 16(39.37,74.5) 17(19.68,74.5) 18(0,74.5) 19(-19.68,74.5) 20(-39.37,74.5)
  rect 104x104 smd paste-52 mask+0: 21(0,0)
  silkscreen extent -84,-110 84,110, body extent -79,-79 79,79, height 39
FAIR-SOT-563F-6-A_V [mm] "SOTFL, 6-Leads, Body 1.7x1.2mm, Pitch 0.5mm"
  rect 0.55x0.3 smd: 1(-0.625,0.5) 2(-0.625,0) 3(-0.625,-0.5) 4(0.625,-0.5) 5(0.625,0) 6(0.625,0.5)
  silkscreen extent -0.75,1.08 -0.5,1.32, body extent -0.81,-0.85 0.81,0.85, height 0.6
FP-ABM11-MFG [mm]
  rect 0.75x0.65 smd paste+0 mask+0: 1(-0.65,-0.5) 2(0.65,-0.5) 3(0.65,0.5) 4(-0.65,0.5)
  silkscreen extent -1.73,-1.22 1.07,1.22, body extent -1.17,-0.97 1.17,0.97, height 0.25
FP-C0402-BB-IPC_A [mm]
  rect 0.765x0.672 smd paste+0 mask+0: 1(-0.454,0) 2(0.454,0)
  body extent -1.04,-0.54 1.04,0.54, height 0.25
LED_0805_G [mm]
  rect 1.2x1.2 smd paste+0 mask+0: 1(-1.05,0) 2(1.05,0)
  silkscreen extent -2.35,-0.67 0.08,0.67, body extent -1.75,-0.77 1.75,0.77, height 0.25
RC04025-L [mm] "Chip Resistor, 2-Leads, Body 1.05x0.55mm, IPC High Density"
  rect 0.45x0.45 smd: 1(-0.4,0) 2(0.4,0)
  body extent -0.53,-0.28 0.53,0.28, height 0.4
SB0603 [mm]
  rect 1x1 smd: 1(-0.85,0) 2(0.85,0)
  Top Layer region: -1.1,-0.5 -0.1,-0.5 -0.1,0.5 -1.1,0.5
  Top Layer region: 0.1,-0.5 1.1,-0.5 1.1,0.5 0.1,0.5
  silkscreen extent -1.6,-0.75 1.6,0.75
SC0603_L [mm] "Chip Capacitor, 2-Leads, Body 1,6x0,8mm, IPC High Density"
  rect 0.8x0.9 smd: 1(-0.75,0) 2(0.75,0)
  body extent -0.8,-0.4 0.8,0.4, height 0.3
SM04B-GHS-TB [mm] "1.25mm pitch/Disconnectable Crimp style connectors"
  rect 0.6x1.7 smd: 1(1.875,-1.875) 2(0.625,-1.875) 3(-0.625,-1.875) 4(-1.875,-1.875)
  rect 1x2.7 smd: M(-3.75,1.325) M(3.75,1.325)
  silkscreen extent -4.1,-2.37 4.1,2.54, body extent -4.12,-2.31 4.13,2.54, height 4.35
SM08B-GHS-TB [mm] "1.25mm pitch/Disconnectable Crimp style connectors"
  rect 0.6x1.7 smd: 1(4.375,-1.875) 2(3.125,-1.875) 3(1.875,-1.875) 4(0.625,-1.875) 5(-0.625,-1.875) 6(-1.875,-1.875) 7(-3.125,-1.875) 8(-4.375,-1.875)
  rect 1x2.7 smd: M(-6.25,1.325) M(6.25,1.325)
  silkscreen extent -6.6,-2.37 6.6,2.54, body extent -6.63,-2.31 6.62,2.54, height 4.35
UFQFPN28-4x4mm [mil]
  rect 22x12 smd paste-11 mask-11: 1(-81.5,59.06) 7(-81.5,-59.06) 15(81.5,-59.06) 21(81.5,59.06)
  rect 32x12 smd paste+0 mask+0: 2(-76.5,39.37) 3(-76.5,19.68) 4(-76.5,0) 5(-76.5,-19.68) 6(-76.5,-39.37) 16(76.5,-39.37) 17(76.5,-19.68) 18(76.5,0) 19(76.5,19.68) 20(76.5,39.37)
  rect 12x22 smd paste-11 mask-11: 8(-59.06,-81.5) 14(59.06,-81.5) 22(59.06,81.5) 28(-59.06,81.5)
  rect 12x32 smd paste+0 mask+0: 9(-39.37,-76.5) 10(-19.68,-76.5) 11(0,-76.5) 12(19.68,-76.5) 13(39.37,-76.5) 23(39.37,76.5) 24(19.68,76.5) 25(0,76.5) 26(-19.68,76.5) 27(-39.37,76.5)
  silkscreen extent -86,-112 112,86, body extent -81,-81 81,81, height 24
XDFN4_711AJ_ONS_OSI [mil]
  round 1 smd paste-5 mask-5: 1(-19,12.75)
  rect 9x10 smd paste-5 mask-5: 2(-19,-12.75) 3(19,-12.75) 4(19,12.75)
  rect 21x21 smd rot 45 paste-10.5 mask+0: 5(0,0)
  Top Layer region: 23.5,-7.75 23.5,-17.75 8.5,-17.75 8.5,-13.75 13.75,-7.75
  Top Layer region: 23.5,7.75 23.5,17.75 8.5,17.75 8.5,13.75 13.75,7.75
  Top Layer region: 0,-10.5 0,-10.5 0,-10.5 0,-10.5 0,-10.5 0,-10.5 0,-10.5 0,-10.5
  Top Layer region: 0,10.5 0,10.5 0,10.5 0,10.5 0,10.5 0,10.5 0,10.5 0,10.5
  Top Layer region: -23.5,7.75 -23.5,17.75 -8.5,17.75 -8.5,13.75 -13.75,7.75
  Top Layer region: -23.5,-7.75 -23.5,-17.75 -8.5,-17.75 -8.5,-13.75 -13.75,-7.75
  Top Layer region: -23.5,17.75 -23.5,7.75 -14.5,7.75 -14.5,17.75
  silkscreen extent -15,26 -13,28, body extent -20,-20 20,20, height 17

## Part data
C1 C2 C49 C50 C51 C52 C68 C69 C72 C73 C74: library part C0603-10µF-6.3V-10CL10A106MQ8NNNC, "10 µF ±20% 6.3V Ceramic Capacitor X5R 0603 (1608 Metric)", Supplier link 1=https://www.digikey.com/en/products/detail/samsung-electro-mechanics/CL10A106MQ8NNNC/3886777?s=N4IgTCBcDaIMIBkCMAGAgqgbAWQIoA4A5YuEAXQF8g, Supplier link 2=https://www.mouser.com/ProductDetail/Samsung-Electro-Mechanics/CL10A106MQ8NNNC?qs=349EhDEZ59qlB6a%2FjjeGAg%3D%3D, Назва за КД="Конденсатор CL10A106MQ8NNNC"
C3 C4 C5 C6 C7 C8 C9 C30 C31 C32 C33 C34 C35 C36 C53 C54 C55 C56 C62 C67 C70 C71: library part C0402-100nF-16V-C0402C104K4RAC7867, "0.1 µF ±10% 16V Ceramic Capacitor X7R 0402 (1005 Metric)", Supplier link 1=https://www.digikey.com/en/products/detail/kemet/C0402C104K4RAC7867/789653, Назва за КД="Конденсатор C0402C104K4RAC7867"
C10 C11 C12 C13 C14 C15 C16 C23 C24 C25 C26 C27 C28 C29 C57 C58 C59 C60 C61: library part C0402-10nF-16V-C0402C103K4RAC7867, "10000 pF ±10% 16V Ceramic Capacitor X7R 0402 (1005 Metric)", Supplier link 1=https://www.digikey.com/en/products/detail/kemet/C0402C103K4RAC7867/411040, Назва за КД="Конденсатор C0402C103K4RAC7867"
C17 C18 C19 C20 C21 C22 C37 C38 C39 C41 C42 C43 C63 C75 C76: library part C0603-1µF-25V-CC0603KRX5R8BB105, "1 µF ±10% 25V Ceramic Capacitor X5R 0603 (1608 Metric)", Supplier link 1=https://www.digikey.com/en/products/detail/yageo/CC0603KRX5R8BB105/2833610?s=N4IgTCBcDaIMJwAwDZEGYDSAlAGgViwA4AhYgRkTxAF0BfIA, Supplier link 2=https://www.mouser.com/ProductDetail/YAGEO/CC0603KRX5R8BB105?qs=BKNoF%2F0xMNuZVooGAHMQbg%3D%3D, Назва за КД="Конденсатор CC0603KRX5R8BB105"
C40 C44: "10 pF ±1% 16V Ceramic Capacitor X8R 0603 (1608 Metric)", Supplier link 1=https://www.digikey.com/en/products/detail/kemet/C0603C100F4HAC7867/7945991, Назва за КД="Конденсатор C0603C100F4HAC7867"
C45 C46 C47 C48: library part C1206_33uF_25V_C3216X5R1E336M160AC, "33 µF ±20% 25V Ceramic Capacitor X5R 1206 (3216 Metric)", Supplier link 1=https://www.digikey.com/en/products/detail/tdk-corporation/C3216X5R1E336M160AC/2792259, Назва за КД="Конденсатор C3216X5R1E336M160AC"
C64: library part C0402-2.2nF-25V-C0402C222K3RAC7867, "2200 pF ±10% 25V Ceramic Capacitor X7R 0402 (1005 Metric)", Supplier link 1=https://www.digikey.com/en/products/detail/kemet/C0402C222K3RAC7867/411035, Назва за КД="Конденсатор C0402C222K3RAC7867"
C65: library part C0402-1.2nF-50V-C0402C122J5GAC7867, "1200 pF ±5% 50V Ceramic Capacitor C0G, NP0 0402 (1005 Metric)", Supplier link 1=https://www.digikey.com/en/products/detail/kemet/C0402C122J5GAC7867/3316991, Назва за КД="Конденсатор C0402C222K3RAC7867"
C66: library part C0402-150nF-35V-CGA2B1X7R1V154K050BC, "0.15 µF ±10% 35V Ceramic Capacitor X7R 0402 (1005 Metric)", Supplier link 1=https://www.digikey.com/en/products/detail/tdk-corporation/CGA2B1X7R1V154K050BC/4931436, Назва за КД="Конденсатор CGA2B1X7R1V154K050BC"
DA1 DA2 DA3 DA5 DA6: "IC REG LINEAR 1.8V 450MA 4XDFN", Supplier link 1=https://www.digikey.com/en/products/detail/onsemi/NCP161AMX180TBG/5257724?s=N4IgTCBcDaIHIGEAKBGAbCgggWQBooA4AGAFQCEBxEAXQF8g, Назва за КД="Мікросхема NCP161AMX180TBG"
DA4 DA7: "IC REG LINEAR 3.3V 450MA 4XDFN", Supplier link 1=https://www.digikey.com/en/products/detail/onsemi/NCP161AMX330TBG/5257729?s=N4IgTCBcDaIHIGEAKBGAbCgggWQBoGZ8AGAFQCEBxEAXQF8g, Назва за КД="Мікросхема NCP161AMX330TBG"
DD1: "STM8 STM8L EnergyLite Microcontroller IC 8-Bit 16MHz 32KB (32K x 8) FLASH 28-UFQFPN (4x4)", Supplier link 1=https://www.digikey.com/en/products/detail/stmicroelectronics/STM8L151G6U6TR/2529374, Назва за КД="Мікросхема STM8L151G6U6TR"
DD2: "Video Receiver IC I2C, I2S HDMI 1.4a, IEC 60958 64-LQFP-EP (10x10) Package", Supplier link 1=https://www.win-source.net/products/detail/analog-devices-inc/adv7611bswz-rl.html, Supplier link 2=https://www.heisener.com/ProductDetail/ADV7611BSWZ-RL, Supplier link 3=https://octopart.com/adv7611bswz-rl-analog+devices-22024330?r=sp, Назва за КД="Мікросхема ADV7611BSWZ-RL"
DD3: "Low Power, Chip Scale, 10-Bit SD/HD Video Encoder, 1.8/3.3 V, 16-bit Video Input Port, -40 to 105 degC, 40-Pin LFCSP (CP-40-1), RoHS, Reel", Supplier link 1=https://www.digikey.com/en/products/detail/analog-devices-inc/ADV7393WBCPZ-REEL/6163897, Назва за КД="Мікросхема ADV7393WBCPZ-REEL"
DD4: "Stereo Audio Interface 24 b Serial 20-LFCSP (4x4)", Supplier link 1=https://www.digikey.com/en/products/detail/analog-devices-inc/SSM2604CPZ-REEL7/1944265?s=N4IgjCBcoLQExVAYygFwE4FcCmAaEA9lANogCsI%2BAnCALoC%2B%2BMN0IKkGO%2BRkpEDjEAl4gAyqICycAGwAGACx16QA, Supplier link 2=https://eu.mouser.com/ProductDetail/Analog-Devices/SSM2604CPZ-REEL7?qs=WIvQP4zGanjzkHQKJZeKuA%3D%3D&utm_source=octopart&utm_medium=aggregator&utm_campaign=584-SSM2604CPZ-R7&utm_content=Analog+Devices+Inc., Назва за КД="Мікросхема SSM2604CPZ-REEL7"
HL1: library part LED_0805_LTST-C170GKT, "Green 569nm LED Indication - Discrete 2.1V 0805 (2012 Metric)", Supplier link 1=https://www.digikey.com/en/products/detail/liteon/LTST-C170GKT/269226, Назва за КД="Світлодіод TJ-S3216SW9TGLC7K-A5"
L1 L2 L3 L4 L5 L6 L7 L8 L9 L10 L11 L12 L13 L14: library part BBHV00160808601Y00, "600 Ohms @ 100 MHz 1 Ferrite Bead 0603 (1608 Metric) 2A 100mOhm", Supplier link 1=https://www.digikey.com/en/products/detail/pulse-electronics/BBHV00160808601Y00/10508599?_gl=1*r82f7z*_up*MQ..&gclid=Cj0KCQiAnKeCBhDPARIsAFDTLTIWUi_VlukfZKLeJup5zjw6K0pO7YUGtIszURMuY4osn_knpUlntF8aAvaFEALw_wcB
R1 R6 R12: library part R0402_10k_ERJ-2RKF1002X, "10 kOhms ±1% 0.1W, 1/10W Chip Resistor 0402 (1005 Metric) Automotive AEC-Q200 Thick Film", Supplier link 1=https://www.digikey.com/en/products/detail/panasonic-electronic-components/ERJ-2RKF1002X/192073, Назва за КД="Резистор ERJ-2RKF1002X"
R2 R9: library part R0402_510_ERJ-2RKF5100X, "510 Ohms ±1% 0.1W, 1/10W Chip Resistor 0402 (1005 Metric) Automotive AEC-Q200 Thick Film", Supplier link 1=https://www.digikey.com/en/products/detail/panasonic-electronic-components/ERJ-2RKF5100X/1746240, Назва за КД="Резистор ERJ-2RKF5100X"
R3 R4: library part R0402_4.7k_ERJ-2RKF4701X, "4.7 kOhms ±1% 0.1W, 1/10W Chip Resistor 0402 (1005 Metric) Automotive AEC-Q200 Thick Film", Supplier link 1=https://www.digikey.com/en/products/detail/panasonic-electronic-components/ERJ-2RKF4701X/1746231?s=N4IgTCBcDaIKICUBSBaMCDSAxALAdgAYBGADRAF0BfIA, Назва за КД="Резистор ERJ-2RKF4701X"
R5: library part R0402_100k_ERJ-2RKF1003X, "100 kOhms ±1% 0.1W, 1/10W Chip Resistor 0402 (1005 Metric) Automotive AEC-Q200 Thick Film", Supplier link 1=https://www.digikey.com/en/products/detail/panasonic-electronic-components/ERJ-2RKF1003X/192081, Назва за КД="Резистор ERJ-2RKF1003X"
R7: library part R0402_1k_ERJ-2RKF1001X, "1 kOhms ±1% 0.1W, 1/10W Chip Resistor 0402 (1005 Metric) Automotive AEC-Q200 Thick Film", Supplier link 1=https://www.digikey.com/en/products/detail/panasonic-electronic-components/ERJ-2RKF1001X/79729, Назва за КД="Резистор ERJ-2RKF1001X"
R8: library part R0402_390k_RK73H1ETTP3903F, "390 kOhms ±1% 0.1W, 1/10W Chip Resistor 0402 (1005 Metric) Automotive AEC-Q200 Thick Film", Supplier link 1=https://www.digikey.com/en/products/detail/koa-speer-electronics-inc/RK73H1ETTP3903F/9844485, Назва за КД="Резистор RK73H1ETTP3903F"
R10: library part R0402_169_ERJ-2RKF1690X, "169 Ohms ±1% 0.1W, 1/10W Chip Resistor 0402 (1005 Metric) Automotive AEC-Q200 Thick Film", Supplier link 1=https://www.digikey.com/en/products/detail/panasonic-electronic-components/ERJ-2RKF1690X/192166, Назва за КД="Резистор ERJ-2RKF1690X"
R11 R14 R15: library part R0402_75_ERJ-2GEJ750X, "75 Ohms ±5% 0.1W, 1/10W Chip Resistor 0402 (1005 Metric) Automotive AEC-Q200 Thick Film", Supplier link 1=https://www.digikey.com/en/products/detail/panasonic-electronic-components/ERJ-2GEJ750X/147072, Назва за КД="Резистор ERJ-2GEJ750X"
R16 R17: library part R0402_100_ERJ-2RKF1000X, "100 Ohms ±1% 0.1W, 1/10W Chip Resistor 0402 (1005 Metric) Automotive AEC-Q200 Thick Film", Supplier link 1=https://www.digikey.com/en/products/detail/panasonic-electronic-components/ERJ-2RKF1000X/192080, Назва за КД="Резистор ERJ-2RKF1000X"
R18 R19: library part R0402_47k_ERJ-2RKF4702X, "47 kOhms ±1% 0.1W, 1/10W Chip Resistor 0402 (1005 Metric) Automotive AEC-Q200 Thick Film", Supplier link 1=https://www.digikey.com/en/products/detail/panasonic-electronic-components/ERJ-2RKF4702X/1746233, Назва за КД="Резистор ERJ-2RKF4702X"
SB1 SB2: library part "Jumper Opened", "Circuit Breaker Opened , for solder closing"
VT1: "Mosfet Array 20V 600mA 446mW Surface Mount SOT-563F", Supplier link 1=https://www.digikey.com/en/products/detail/onsemi/fdy3000nz/1923009, Назва за КД="Транзистор FDY3000NZ"
XS1 XS4 XS5: library part "JST GH SM04B-GHS-TB", "1.25mm pitch/Disconnectable Crimp style connectors", Назва за КД="Роз'єм SM04B-GHS-TB(LF)(SN)"
XS2: "HDMI - Mini Receptacle Connector 19 Position Surface Mount, Right Angle; Through Hole", Supplier link 1=https://www.digikey.com/en/products/detail/w%C3%BCrth-elektronik/685119136923/2508508, Назва за КД="Роз'єм 685119136923"
XS3: library part "JST GH SM08B-GHS-TB", "1.25x08 JST GH RA", Supplier link 1=https://www.digikey.com/en/products/detail/jst-sales-america-inc/SM08B-GHS-TB/807792, Назва за КД="Роз'єм SM08B-GHS-TB"
ZQ1: "28.63636 MHz ±20ppm Crystal 10pF 100 Ohms 4-SMD, No Lead", Supplier link 1=https://www.digikey.com/en/products/detail/abracon-llc/ABM11-28-63636MHZ-D2X-T3/2623744?_gl=1*z1352j*_up*MQ..&gclid=Cj0KCQiAnKeCBhDPARIsAFDTLTIWUi_VlukfZKLeJup5zjw6K0pO7YUGtIszURMuY4osn_knpUlntF8aAvaFEALw_wcB, Назва за КД="Кварц ABM11-28.63636MHZ-D2X-T3"

## Free pads (board coordinates)
  round 0.4 hole 0.2: 78(6.775,18.275) 78(6.775,19.475) 78(6.775,20.675) 78(6.775,21.875) 78(6.775,23.075) 78(10.275,27.075) 78(19.825,28.25) 78(20.475,33.575) 78(25.375,30.375)
  round 7 hole 3.2: 80(4,4) 80(4,46) 80(66,4) 80(66,46)

## Via types
v1: diameter 0.4, hole 0.2, Top Layer to Bottom Layer, tented both sides, 80 vias
v2: diameter 0.5, hole 0.2, Top Layer to Bottom Layer, tented bottom, 41 vias
v3: diameter 0.4, hole 0.2, Top Layer to Bottom Layer, 3 vias

## Nets (pads, with @x,y where several pads share a name; then routed paths per layer and width w, separated by ;. In a path a pad name is that pad's centre, name@x,y a point inside that pad or via, vN(x,y) a via of type N, cw(c..) or ccw(c..) an arc to the next point about the centre after c; other vN are vias at no path point)
5V_out: C1.2 C2.2 L4.1 XS3.2 | length 20.7
  Top Layer w0.4: C1.2@61.949,19.693 C1.2@61.952,19.697 ; XS3.2@64.897,19.697 XS3.2@64.9,19.7
  Top Layer w0.5: L4.1@59.525,4.2 59.525,19.45 59.768,19.693 C2.2@60.707,19.693 C1.2@61.949,19.693 ; C1.2@61.952,19.697 XS3.2@64.897,19.697
"+1.8V_ LVR_1": C21.2 DA3.1 L6.2 | length 4.1
  Bottom Layer w0.2: DA3.1@16.833,10.574 17.259,11 C21.2@18.35,11 L6.2@18.35,13.45
"+1.8V_ LVR_2": C42.2 C48.2 DA6.1 L11.1 | length 14.3
  Layer 2 w0.2: v1(34.175,6.25) 34.175,7.225 36.975,10.025 v1(36.975,13.975)
  Bottom Layer w0.2: DA6.1@31.683,3.871 32.109,4.297 C42.2@33.2,4.297 33.199,4.298 C48.2@33.199,6.275 33.224,6.25 v1(34.175,6.25) ; v1(36.975,13.975) L11.1@36.975,14.75
"+1.8V_ LVR_3": C76.2 DA1.1 L7.2 | length 4
  Bottom Layer w0.2: L7.2@26.65,30.65 C76.2@29,30.65 29,29.559 DA1.1@29.426,29.133
"+1.8V_ PVDD_2": C41.2 C46.2 DA5.1 L9.1 | length 6.9
  Bottom Layer w0.2: DA5.1@39.705,3.896 40.131,4.322 C41.2@41.222,4.322 42.172,4.322 42.65,4.8 C46.2@42.65,6.676 42.651,6.675 L9.1@44.4,6.675
+1.8V_PVDD_1: C20.2 DA2.1 L5.2 | length 7.1
  Bottom Layer w0.2: DA2.1@18.525,30.771 18.951,30.345 C20.2@18.951,29.253 18.954,29.25 L5.2@24.4,29.25
+3.3V_LVR_1: C22.2 C45.2 DA4.1 L1.1 L2.1 L3.1 L8.1 L12.2 L13.2 | length 66.4
  Top Layer w0.2: v1(29.55,35.825) L1.1@29.55,36.7
  Layer 2 w0.2: v1(31.625,24.775) v1@31.662,24.775
  Layer 2 w0.4: v1(29.55,35.825) 35.3,30.075 v1(37,30.075) ; v1@31.662,24.775 v1@36.962,30.075
  Bottom Layer w0.2: L2.1@15.258,27.808 15.258,36.392 ; C22.2@15.258,37.449 16.349,37.449 DA4.1@16.775,37.875 ; L3.1@30.197,23.907 L3.1@30.247,23.907 ; v1(37,30.075) L13.2@38.225,30.075 38.225,29.25 38.65,28.825 42.2,28.825 ; L12.2@47.15,29.45 44.475,29.45 43.85,28.825 42.2,28.825 ; C45.2@48.45,24.349 44.976,24.349 L8.1@44.975,24.35 44.975,25.55 42.2,28.325 42.2,28.825
  Bottom Layer w0.4: L2.1@15.25,27.8 L2.1@15.258,27.808 ; C22.2@15.258,37.449 15.258,36.392 15.825,35.825 v1(29.55,35.825) ; L3.1@30.247,23.907 31.115,24.775 v1(31.625,24.775)
+3.3V_LVR_A: C43.2 C47.2 DA7.1 L10.1 | length 6.5
  Bottom Layer w0.2: DA7.1@45.089,3.525 45.515,3.951 C43.2@46.606,3.951 46.608,3.949 C47.2@48.575,3.949 50.358,3.949 50.475,4.066 L10.1@50.475,4.975
"+5V Power": DD2.64 R5.2 R7.1 XS2.18 | length 13.9
  Top Layer w0.2: XS2.18@7.8,25.074 7.813,25.087 9.262,25.087 R7.1@9.275,25.1 R5.2@10.3,25.1 10.3,24.525 10.5,24.325 12.25,24.325 14.164,26.239 DD2.64@20.263,26.239
+5V_in: C17.2 C18.2 C19.2 C37.2 C38.2 C39.2 C75.2 DA1.3 DA1.4 DA2.3 DA2.4 DA3.3 DA3.4 DA4.3 DA4.4 DA5.3 DA5.4 DA6.3 DA6.4 DA7.3 DA7.4 L4.2 XS4.3 XS4.4 | length 159
  Top Layer w0.2: v1(6.7,33.7) 8.15,33.7 8.625,33.225 v1(16.5,33.225) 16.5,39.3 17.075,39.875 v1(19.25,39.875)
  Top Layer w0.4: XS4.4@5.075,32.45 v1(6.7,32.45) ; XS4.3@5.075,33.7 v1(6.7,33.7)
  Top Layer w0.5: v1(37.9,1.95) 48.554,1.95 49.454,1.05 59.232,1.05 59.525,1.343 L4.2@59.525,2.7
  Bottom Layer w0.2: v1(14.35,8.4) 14.35,9.5 15.454,9.5 15.867,9.913 DA3.3@15.867,9.926 15.867,9.939 15.746,10.06 15.746,10.44 15.867,10.561 DA3.4@15.867,10.574 ; v1(16.5,33.225) 17.423,33.225 C17.2@17.451,33.253 ; DA4.4@17.74,37.875 17.74,37.888 17.862,38.009 17.862,38.388 17.74,38.51 DA4.3@17.74,38.523 18.158,38.941 C19.2@19.25,38.941 ; DA2.4@18.525,31.736 18.513,31.736 18.391,31.858 18.012,31.858 17.89,31.736 DA2.3@17.878,31.736 17.865,31.736 17.851,31.75 17.851,31.763 17.451,32.162 17.451,32.476 C17.2@17.451,33.253 ; v1(19.25,39.875) 19.25,38.957 C19.2@19.258,38.949 ; v1(29.175,1.95) 29.175,2.772 C38.2@29.2,2.797 30.304,2.797 30.717,3.21 DA6.3@30.717,3.223 30.717,3.236 30.596,3.357 30.596,3.736 30.717,3.858 DA6.4@30.717,3.871 ; DA1.4@29.426,28.168 29.439,28.168 29.56,28.046 29.94,28.046 30.061,28.168 DA1.3@30.074,28.168 30.087,28.168 30.5,27.754 C75.2@30.5,26.65 31.35,26.65 31.9,27.2 31.9,32.1 29.375,34.625 17.65,34.625 17.451,34.426 C17.2@17.451,33.253 ; DA5.4@38.739,3.896 38.739,3.883 38.618,3.761 38.618,3.382 38.739,3.261 DA5.3@38.739,3.248 38.739,3.235 38.326,2.822 C37.2@37.222,2.822 37.2,2.8 v1(37.2,1.95) 38,1.15 C39.2@44.125,1.15 44.125,2.866 44.124,2.864 DA7.3@44.124,2.877 44.124,2.89 44.002,3.011 44.002,3.39 44.124,3.512 DA7.4@44.124,3.525
  Bottom Layer w0.5: v1(6.7,33.7) v1(6.7,32.45) 6.7,29.95 4.4,27.65 4.4,11.2 7.2,8.4 v1(14.35,8.4) 20.8,1.95 v1(29.175,1.95) v1(37.2,1.95) v1(37.9,1.95)
AGND: C1.1 C2.1 C51.1 C55.1 C60.1 C63.1 C70.2 C71.1 C73.2 C74.1 DD3.24 DD3.41 DD4.14 L14.1 R9.2 R11.1 R14.1 R15.1 R18.1 R19.1 XS3.1 XS3.3 XS3.5 XS3.7 XS3.M | length 51.3
  Top Layer w0.2: v2(46.32,11.936) 46.32,11.654 DD3.24@47.133,10.84 ; DD4.14@48.167,31.1 v1(49.2,31.1) ; C70.2@50.15,32.704 50.2,32.754 50.2,32.8 50.7,33.3 C73.2@51.5,33.3 v1(51.5,34.15) ; v1(50.6,9.2) R11.1@50.158,9.642 R14.1@50.758,10.242 ; R18.1@56.425,27.2 56.437,27.187 56.437,26.538 v1(56.45,26.525) ; R19.1@56.425,30.6 v1(56.425,31.275) ; v1(63.3,20.95) XS3.3@64.9,20.95 ; v1(63.3,23.45) XS3.5@64.9,23.45 ; v1(63.3,25.95) XS3.7@64.9,25.95
  Top Layer w0.5: C2.1@60.707,18.193 C1.1@61.949,18.193 62.818,18.193 63.075,18.45 XS3.1@64.9,18.45
  Bottom Layer w0.2: C71.1@50.15,29.518 v1(50.15,28.8) 51.375,28.8 C74.1@51.5,28.925 ; v1(50.6,9.2) 51.029,8.771 C60.1@52.1,8.771 52.104,8.775 C55.1@53.5,8.775 ; C63.1@55.2,8.2 56.575,8.2 C51.1@56.6,8.225 58.2,8.225 58.225,8.2 ; v1(63.3,20.95) v1(63.3,23.45) v1(63.3,25.95)
  Bottom Layer w0.5: L14.1@58.225,4.2 58.225,8.2 58.225,19.925 59.25,20.95 v1(63.3,20.95)
  other v2: 45.542,11.159 44.764,11.936 43.986,12.714 45.542,12.714 47.097,12.714 43.208,13.492 44.764,13.492 46.32,13.492 47.875,13.492 43.986,14.27 45.542,14.27 47.097,14.27 44.764,15.048 46.32,15.048 45.542,15.825
CEC: DD2.61 XS2.14 | length 15.7
  Top Layer w0.154: XS2.14@7.8,23.474 11.974,23.474 13.57,25.07 21.672,25.07 21.763,25.16 DD2.61@21.763,26.239
CV_out: DD3.28 R15.2 XS3.4 | length 25.3
  Top Layer w0.09: DD3.28@48.547,12.255 49.027,11.775 R15.2@51.8,11.775 55.025,11.775 56.45,13.2 56.45,20.825 57.825,22.2 XS3.4@64.9,22.2
CVDD1: C23.2 C24.2 C30.2 C31.2 DD2.2 DD2.14 L6.1 | length 17.1
  Top Layer w0.2: DD2.14@18.288,17.764 19.514,17.764 v1(20.239,17.039) ; DD2.2@18.288,23.764 18.298,23.754 20.225,23.754 v1(20.236,23.743)
  Layer 2 w0.2: v1(20.236,23.743) 20.257,23.721 20.257,23.243 21,22.5 21,17.8 v1(20.239,17.039)
  Bottom Layer w0.2: L6.1@18.35,14.95 18.35,16.375 19.029,17.054 C24.2@19.6,17.054 19.614,17.039 v1(20.239,17.039) 20.861,17.039 C31.2@20.875,17.054 ; C30.2@19.6,23.743 v1(20.236,23.743) 20.871,23.743 C23.2@20.875,23.746